# Allegro board moborts.brd
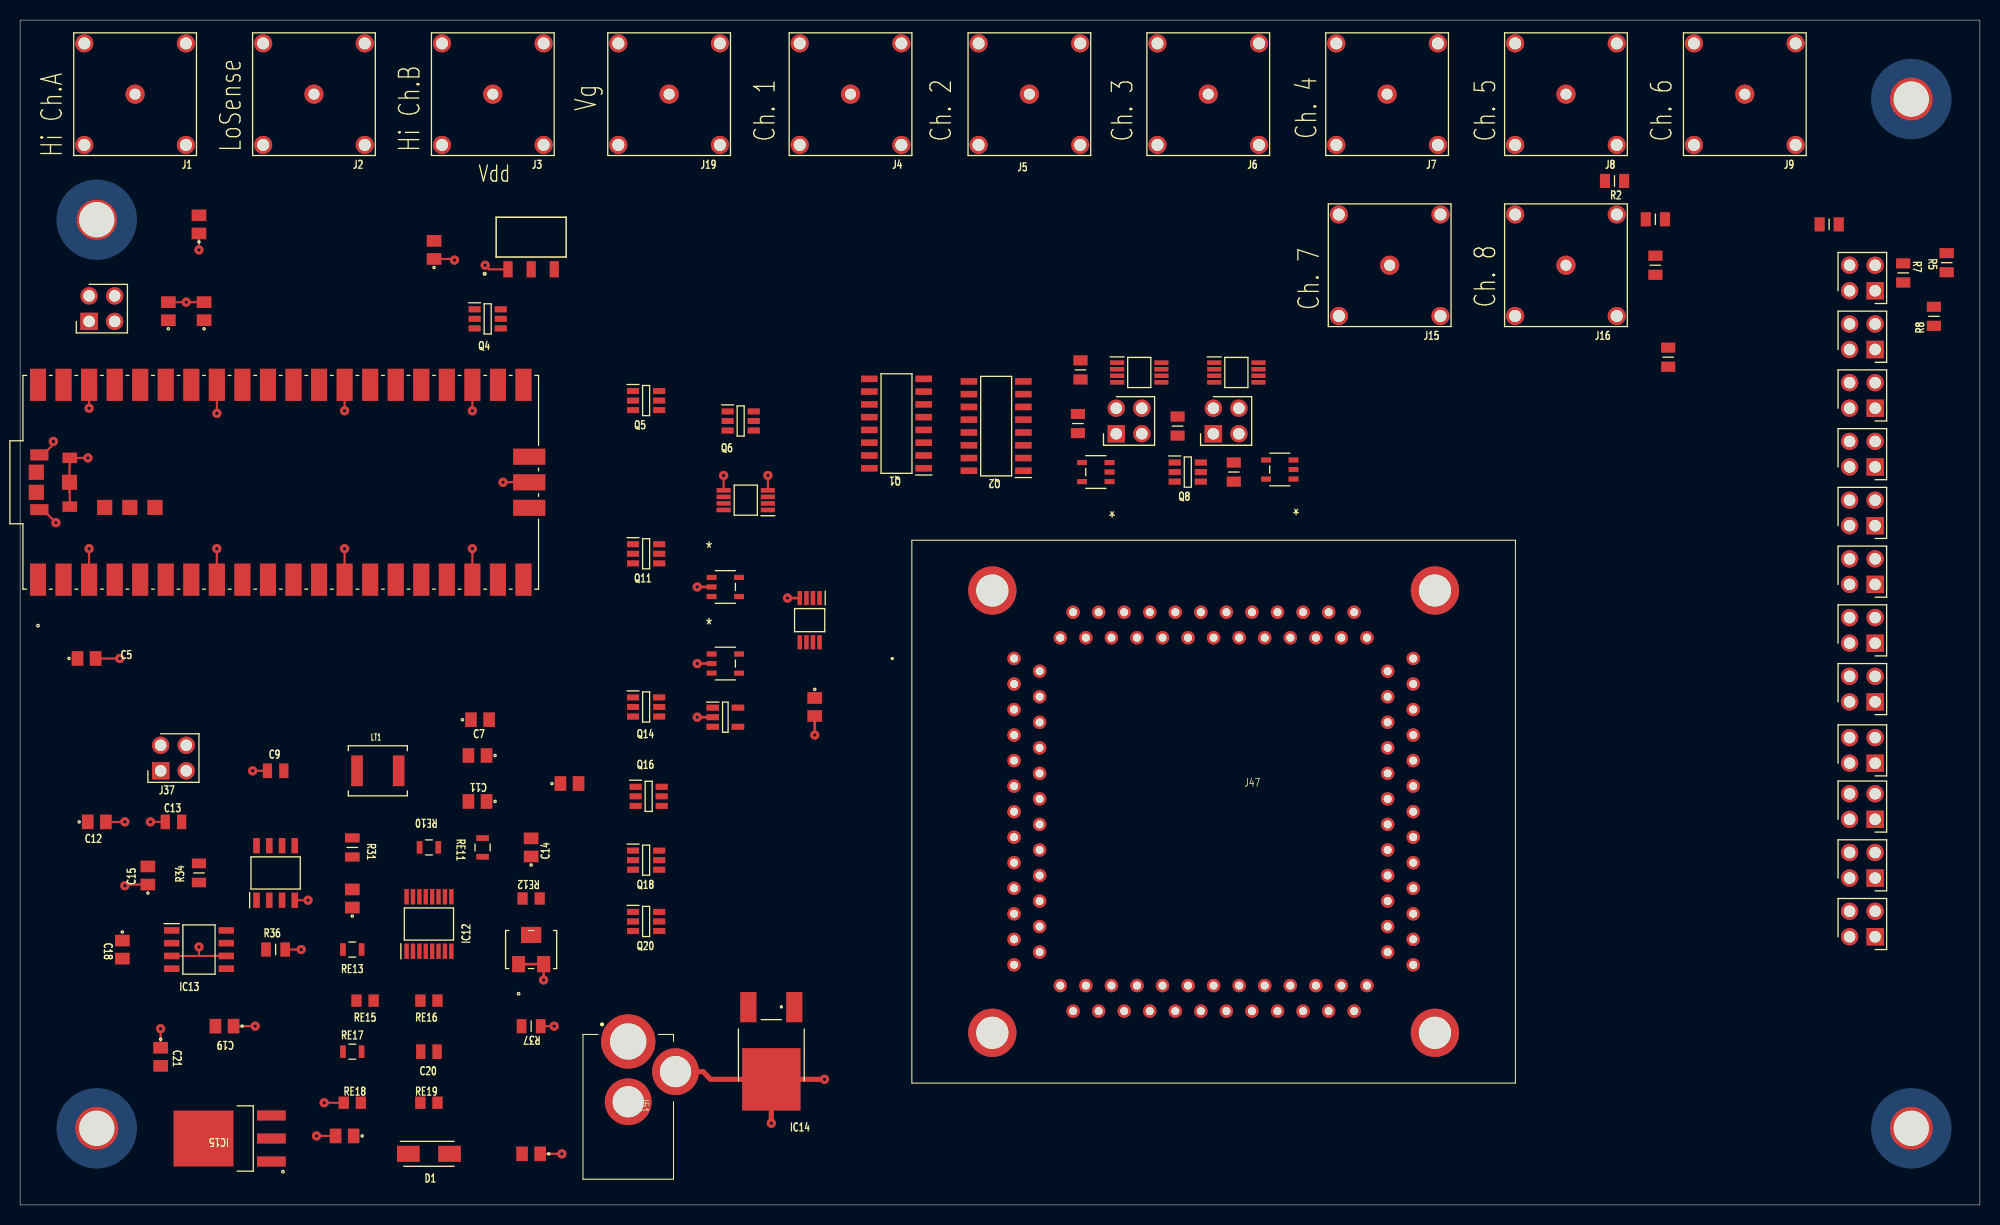
[diagram p0: board, top side]
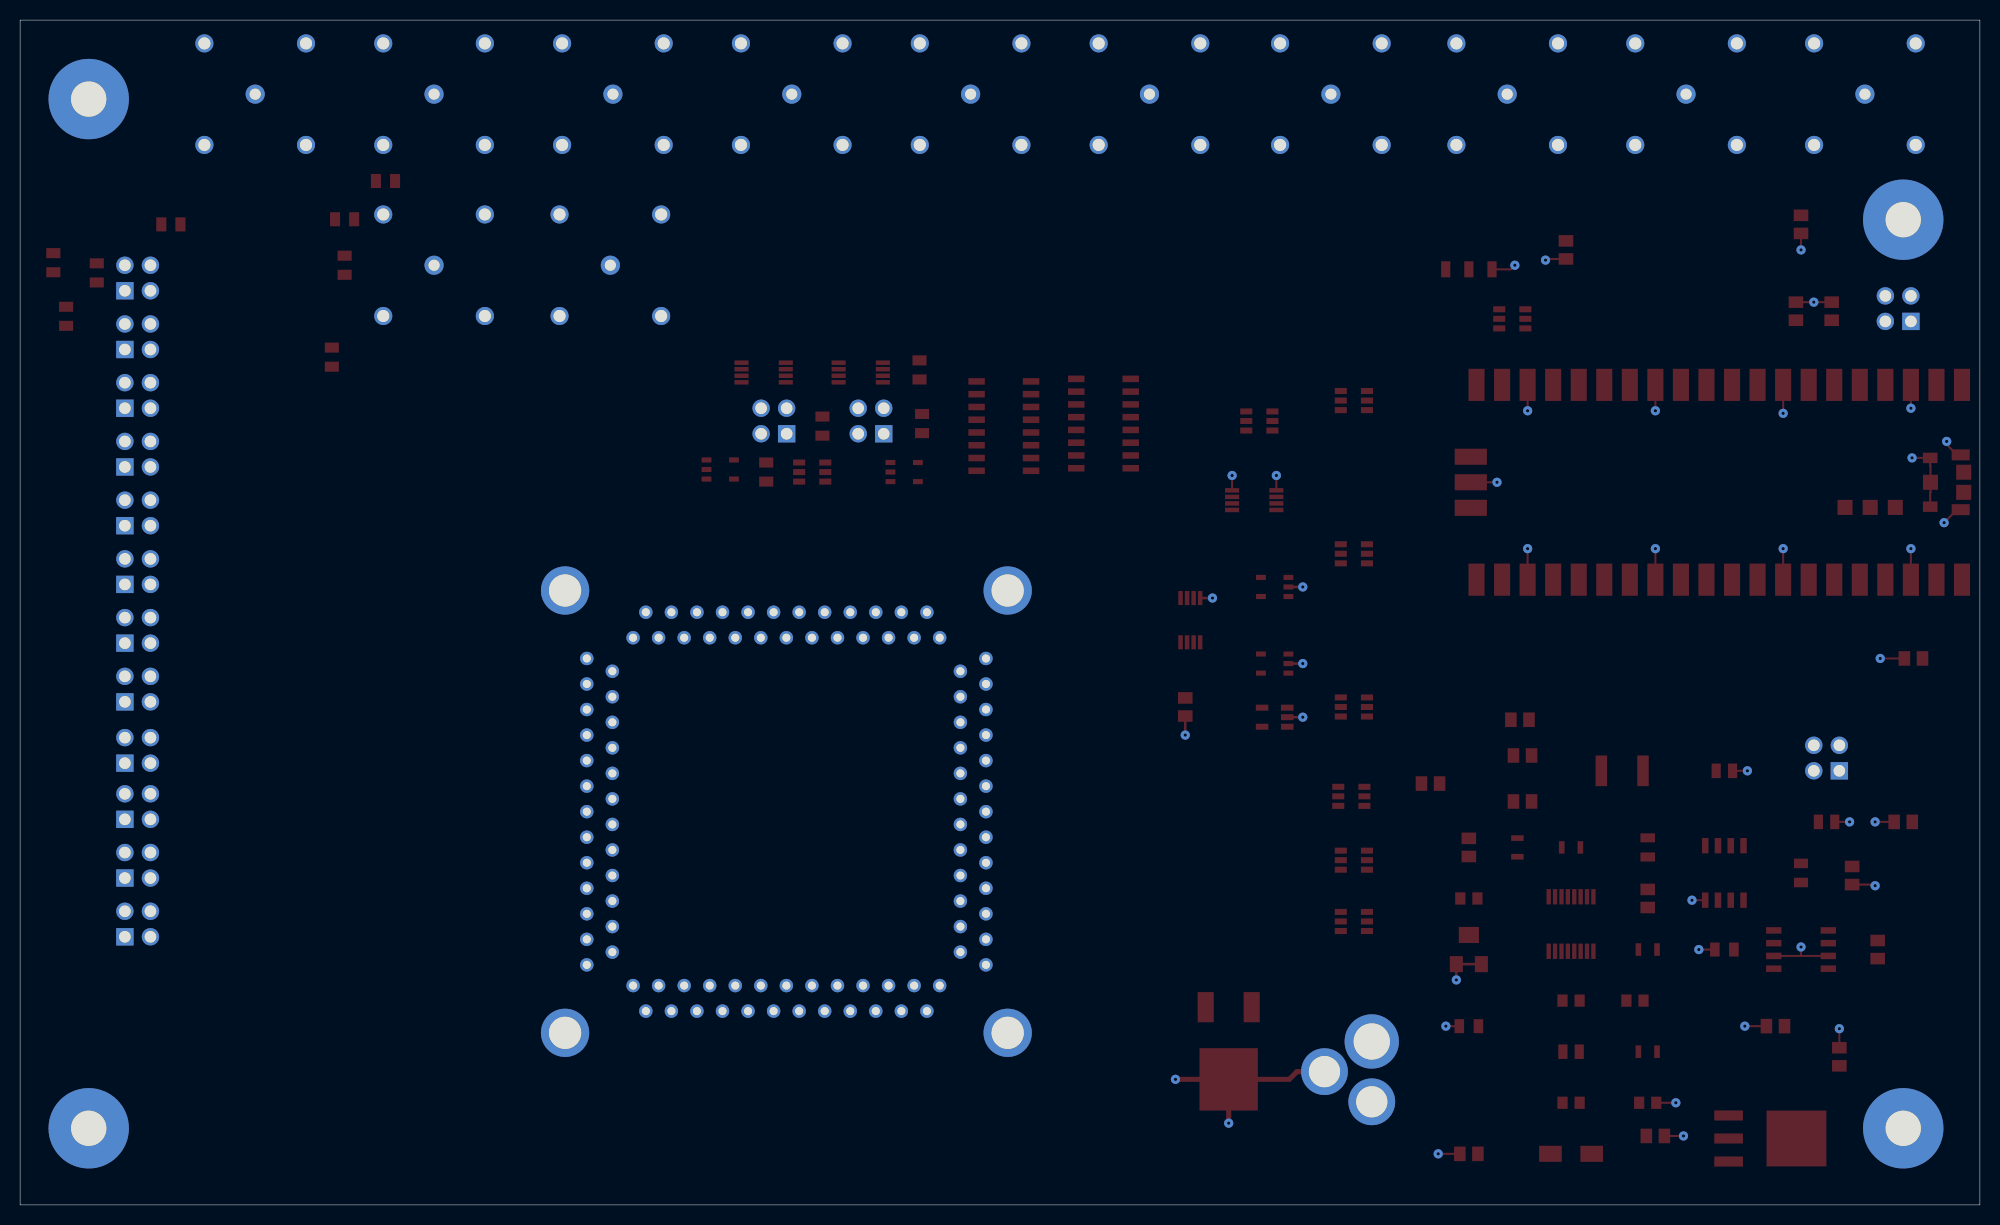
[diagram p1: board, bottom side, seen from below]

Outline 194.82 x 117.86 mm; copper layers: TOP, LAYER_1, GND, BOTTOM. Coordinates in mm from the lower left corner of the outline.
Outline path: 0,117.86 194.82,117.86 194.82,0 0,0 0,117.86

## Design rules (mm)
constraint set DEFAULT: min track width 0.203, pair gap 0.203

## Placement (name value [footprint] x y rotation side)
1  GND Mounting Hole  [M3MOUNTINGHOLE_ELEC]  188 110 0 top
2  GND2 Mounting Hole  [M3MOUNTINGHOLE_ELEC#2]  7.62 98 0 top
3  GND Mounting Hole  [M3MOUNTINGHOLE_ELEC]  7.62 7.62 0 top
4  GND Mounting Hole  [M3MOUNTINGHOLE_ELEC]  188 7.62 0 top
C1  0.1uF  [C0805]  17.78 97.54 90 top
C2  0.1uF  [C0805]  41.15 95 90 top
C3  1 uF  [C0805]  14.73 88.9 90 top
C4  1 uF  [C0805]  18.29 88.9 90 top
C5  1 uF  [C0805]  6.6 54.36 0 top
C6  1 uF  [C0805]  78.99 49.53 270 top
C7  0.015uF  [C0805]  45.72 48.26 0 top
C8  1 uF  [C0805]  45.47 44.7 180 top
C9  10pF  [CAPC2013X94N]  25.4 43.18 0 top
C10  4.7uF  [C0805]  54.61 41.91 0 top
C11  10uF  [C0805]  45.47 40.13 180 top
C12  1 uF  [C0805]  7.62 38.1 0 top
C13  10pF  [CAPC2013X94N]  15.24 38.1 0 top
C14  3.9uF  [C0805]  50.8 35.56 90 top
C15  0.1uF  [C0805]  12.7 32.77 90 top
C17  20pF  [C0805]  33.02 30.48 90 top
C18  10uF  [C0805]  10.16 25.4 270 top
C19  0.1uF  [C0805]  20.32 17.78 180 top
C20  10pF  [CAPC2013X94N]  40.64 15.24 0 top
C21  0.015uF  [C0805]  13.97 14.73 270 top
C22  10uF  [C0805]  32.26 6.86 180 top
C23  0.1uF  [C0805]  50.8 5.08 180 top
CR1  LD1117S33TR  [SOT-223_STM]  50.8 96.27 0 top
D1  FM4002-W  [DIOM5025X231N]  40.64 5.08 0 top
IC2  OPA202IDGKR  [SOP65P490X110-8N]  111.25 82.8 0 top
IC3  OPA202IDGKR  [SOP65P490X110-8N]  120.9 82.8 0 top
IC8  OPA202IDGKR  [SOP65P490X110-8N]  72.14 70.1 180 top
IC9  OPA202IDGKR  [SOP65P490X110-8N]  78.49 58.17 270 top
IC10  1p2Vregulatorr  [SOT95P275X110-5N]  70.1 48.51 0 top
IC11  UCC284DP-ADJ  [SOIC127P600X175-8N]  25.4 33.02 90 top
IC12  LTC6082IGN#PBF  [SOP64P601X175-16N]  40.64 27.94 90 top
IC13  MAX660CSA+  [SOIC127P600X175-8N]  17.78 25.4 0 top
IC14  5vReg  [NCV5501DT50RKG]  74.68 16 90 top
IC15  LM317MDTG  [TO229P990X238-4N]  20.83 6.6 180 top
J1  CSInput  [1-1337445-0]  11.43 110.49 0 top
J2  LoSense  [1-1337445-0]  29.21 110.49 0 top
J3  VddIN  [1-1337445-0]  46.99 110.49 0 top
J4  ch1  [1-1337445-0]  82.55 110.49 0 top
J5  ch2  [1-1337445-0]  100.33 110.49 0 top
J6  ch3  [1-1337445-0]  118.11 110.49 0 top
J7  ch4  [1-1337445-0]  135.89 110.49 0 top
J8  ch5  [1-1337445-0]  153.67 110.49 0 top
J9  ch6  [1-1337445-0]  171.45 110.49 0 top
J15  ch7  [1-1337445-0]  136.14 93.47 0 top
J16  ch8  [1-1337445-0]  153.67 93.47 0 top
J19  Vg  [1-1337445-0]  64.52 110.49 0 top
J21  amp0Gain  [HDRV4W67P254_2X2_508X483X858P]  184.4 90.93 90 top
J22  isourceSelect  [HDRV4W67P254_2X2_508X483X858P]  6.86 87.88 0 top
J23  amp1Gain  [HDRV4W67P254_2X2_508X483X858P]  184.4 85.09 90 top
J24  amp2Gain  [HDRV4W67P254_2X2_508X483X858P]  184.4 79.25 90 top
J25  p5macs0,1  [HDRV4W67P254_2X2_508X483X858P]  108.97 76.71 0 top
J26  p5macs2,3  [HDRV4W67P254_2X2_508X483X858P]  118.62 76.71 0 top
J29  amp3Gain  [HDRV4W67P254_2X2_508X483X858P]  184.4 73.41 90 top
J30  amp4Gain  [HDRV4W67P254_2X2_508X483X858P]  184.4 67.56 90 top
J31  amp5Gain  [HDRV4W67P254_2X2_508X483X858P]  184.4 61.72 90 top
J32  amp6Gain  [HDRV4W67P254_2X2_508X483X858P]  184.4 55.88 90 top
J34  amp7Gain  [HDRV4W67P254_2X2_508X483X858P]  184.4 50.04 90 top
J35  vout1Byp  [HDRV4W67P254_2X2_508X483X858P]  184.4 43.94 90 top
J37  biasteeBYP  [HDRV4W67P254_2X2_508X483X858P]  13.97 43.18 0 top
J39  vout3Byp  [HDRV4W67P254_2X2_508X483X858P]  184.4 38.35 90 top
J41  vout5Byp  [HDRV4W67P254_2X2_508X483X858P]  184.4 32.51 90 top
J42  vout7Byp  [HDRV4W67P254_2X2_508X483X858P]  184.4 26.67 90 top
J47  IC51-1004-405-1  [IC5110044051]  98.81 54.36 0 top
J51  12vPS  [PJ202AH]  60.45 16.26 270 top
L1  100 uH  [1812FS104JLC]  35.56 43.18 90 top
Q1  ALD210800ASCL  [SOIC127P600X175-16N]  87.12 77.72 180 top
Q2  ALD210800ASCL  [SOIC127P600X175-16N]  97.03 77.47 180 top
Q4  chan1  [SOT95P285X145-6N]  46.48 88.14 0 top
Q5  chan2  [SOT95P285X145-6N]  62.23 80.01 0 top
Q6  p5macs0,1  [SOT95P285X145-6N]  71.63 77.98 0 top
Q8  p5macs2,3  [SOT95P285X145-6N]  116.08 72.9 0 top
Q11  chan3  [SOT95P285X145-6N]  62.23 64.77 0 top
Q14  chan4  [SOT95P285X145-6N]  62.23 49.53 0 top
Q16  vgLSelect  [SOT95P285X145-6N]  62.48 40.64 0 top
Q18  vddSelect  [SOT95P285X145-6N]  62.23 34.29 0 top
Q20  vgPSelect  [SOT95P285X145-6N]  62.23 28.19 0 top
R2  300  [RESC2012X65N]  158.5 101.85 0 top
R3  300  [RESC2012X65N]  162.56 98.04 180 top
R4  300  [RESC2012X65N]  179.83 97.54 0 top
R5  300  [RESC2012X65N]  191.52 93.73 270 top
R6  300  [RESC2012X65N]  162.56 93.47 90 top
R7  300  [RESC2012X65N]  187.2 92.71 270 top
R8  300  [RESC2012X65N]  190.25 88.39 90 top
R9  300  [RESC2012X65N]  163.83 84.33 270 top
R10  1K  [RESC2012X65N]  105.41 83.06 90 top
R13  1K  [RESC2012X65N]  105.16 77.72 270 top
R17  1K  [RESC2012X65N]  115.06 77.47 90 top
R21  1K  [RESC2012X65N]  120.65 72.9 90 top
R31  10M  [RESC2012X55N]  33.02 35.56 270 top
R34  10K  [RESC2012X60N]  17.78 33.02 90 top
R36  10K  [RESC2012X60N]  25.4 25.4 180 top
R37  10K  [RESC2012X60N]  50.8 17.78 180 top
RE1  p5maCS3  [21-0057F_MXM]  125.22 73.15 180 top
RE3  p5maCS2  [21-0057F_MXM]  106.93 72.9 180 top
RE7  SC0915  [SC0915_RPI]  25.91 71.88 90 top
RE8  p5maCS1  [21-0057F_MXM]  70.1 61.47 0 top
RE9  p5maCS0  [21-0057F_MXM]  70.1 53.85 0 top
RE10  100K  [MCU0805_VIS]  40.64 35.56 180 top
RE11  100K  [MCU0805_VIS]  45.97 35.56 270 top
RE12  97.6K  [RC0805N_YAG]  50.8 30.48 180 top
RE13  100K  [MCU0805_VIS]  33.02 25.4 0 top
RE14  POT  [POT_PVGA5_BRN]  50.8 25.4 90 top
RE15  1K  [RC0805N_YAG]  34.29 20.32 0 top
RE16  100  [RC0805N_YAG]  40.64 20.32 0 top
RE17  100K  [MCU0805_VIS]  33.02 15.24 0 top
RE18  100  [RC0805N_YAG]  33.02 10.16 0 top
RE19  470  [RC0805N_YAG]  40.64 10.16 0 top

## Library data of the parts
1-4 = m3MountingHole
C1 C2 C15 C19 C23 = C0805R104J5RACTU
C3-C6 C8 C12 = 0805ZC105JAT2A
C7 C10 C17 C21 = C0805X200J5GACTU
C9 C13 C20 = 08053A100KAT2A
C11 C18 C22 = C0805C106M3PAC7210
C14 = C0805C395K9PACTU
CR1 = LD1117S33TR: User Part Number: PN; Tolerance: TOL
D1 = FM4002-W
IC2 IC3 IC8 IC9 = OPA202IDGKR
IC10 = NCV8164ASN120T1G
IC11 = UCC284DP-ADJ
IC12 = LTC6082IGN#PBF
IC13 = MAX660CSA+
IC14 = NCV5501DT50RKG
IC15 = LM317MDTG
J1-J9 J15 J16 J19 = 1-1337445-0
J21-J26 J29-J32 J34 J35 J37 J39 J41 J42 = M22-2020205
J47 = IC51-1004-405-1
J51 = PJ-202AH
L1 = 1812FS-104JLC
Q1 Q2 = ALD210800ASCL
Q4-Q6 Q8 Q11 Q14 Q16 Q18 Q20 = DMN2004DMK-7
R2-R10 R13 R17 R21 = SDR10EZPF2001
R31 = MCU08050C1005FP500
R34 R36 R37 = AT0805FRE0710KL
RE1 RE3 RE8 RE9 = DS4303RTR: User Part Number: PN; Tolerance: TOL
RE7 = SC0915: User Part Number: PN; Tolerance: TOL
RE10 RE11 RE13 RE17 = MCU08050C1003FP500: User Part Number: PN; Tolerance: TOL
RE12 = RT0805FRE0797K6L: User Part Number: PN; Tolerance: TOL
RE14 = PVG5A502C03R00
RE15 = RT0805FRE071KL: User Part Number: PN; Tolerance: TOL
RE16 RE18 = RT0805BRE07100RL: User Part Number: PN; Tolerance: TOL
RE19 = RT0805DRD07470RL: User Part Number: PN; Tolerance: TOL

## Footprints (pads in the part's own frame, mm; a bottom-side part is the same pattern mirrored in y, then rotated)
1-1337445-0
  round 1.905 hole 1.1: 1(0,0)
  round 1.8 hole 1.2: 2(-5.05,-5.05) 3(5.05,-5.05) 4(5.05,5.05) 5(-5.05,5.05)
21-0057F_MXM
  rect 0.978x0.508 smd: 1(-1.365,0.95) 2(-1.365,0) 3(-1.365,-0.95) 4(1.365,-0.95) 5(1.365,0.95)
1812FS104JLC
  rect 3.05x1.14 smd: 1(0,-2.07) 2(0,2.07)
C0805
  rect 1.15x1.45 smd: 1(-0.9,0) 2(0.9,0)
CAPC2013X94N
  rect 0.914x1.448 smd: 1(-0.813,0) 2(0.813,0)
DIOM5025X231N
  rect 2.25x1.6 smd: 1(-2.05,0) 2(2.05,0)
HDRV4W67P254_2X2_508X483X858P
  rect 1.725x1.725 hole 1.15: 1(0,0)
  round 1.725 hole 1.15: 2(0,2.54) 3(2.54,0) 4(2.54,2.54)
IC5110044051
  round 1.333 hole 0.8: 1(0,-15.24) 2(2.54,-16.51) 3(0,-17.78) 4(2.54,-19.05) 5(0,-20.32) 6(2.54,-21.59) 7(0,-22.86) 8(2.54,-24.13) 9(0,-25.4) 10(2.54,-26.67) 11(0,-27.94) 12(2.54,-29.21) 13(0,-30.48) 14(4.6,-32.54) 15(5.87,-35.08) 16(7.14,-32.54) 17(8.41,-35.08) 18(9.68,-32.54) 19(10.95,-35.08) 20(12.22,-32.54) 21(13.49,-35.08) 22(14.76,-32.54) 23(16.03,-35.08) 24(17.3,-32.54) 25(18.57,-35.08) 26(19.84,-32.54) 27(21.11,-35.08) 28(22.38,-32.54) 29(23.65,-35.08) 30(24.92,-32.54) 31(26.19,-35.08) 32(27.46,-32.54) 33(28.73,-35.08) 34(30,-32.54) 35(31.27,-35.08) 36(32.54,-32.54) 37(33.81,-35.08) 38(35.08,-32.54) 39(39.68,-30.48) 40(37.14,-29.21) 41(39.68,-27.94) 42(37.14,-26.67) 43(39.68,-25.4) 44(37.14,-24.13) 45(39.68,-22.86) 46(37.14,-21.59) 47(39.68,-20.32) 48(37.14,-19.05) 49(39.68,-17.78) 50(37.14,-16.51) 51(39.68,-15.24) 52(37.14,-13.97) 53(39.68,-12.7) 54(37.14,-11.43) 55(39.68,-10.16) 56(37.14,-8.89) 57(39.68,-7.62) 58(37.14,-6.35) 59(39.68,-5.08) 60(37.14,-3.81) 61(39.68,-2.54) 62(37.14,-1.27) 63(39.68,0) 64(35.08,2.06) 65(33.81,4.6) 66(32.54,2.06) 67(31.27,4.6) 68(30,2.06) 69(28.73,4.6) 70(27.46,2.06) 71(26.19,4.6) 72(24.92,2.06) 73(23.65,4.6) 74(22.38,2.06) 75(21.11,4.6) 76(19.84,2.06) 77(18.57,4.6) 78(17.3,2.06) 79(16.03,4.6) 80(14.76,2.06) 81(13.49,4.6) 82(12.22,2.06) 83(10.95,4.6) 84(9.68,2.06) 85(8.41,4.6) 86(7.14,2.06) 87(5.87,4.6) 88(4.6,2.06) 89(0,0) 90(2.54,-1.27) 91(0,-2.54) 92(2.54,-3.81) 93(0,-5.08) 94(2.54,-6.35) 95(0,-7.62) 96(2.54,-8.89) 97(0,-10.16) 98(2.54,-11.43) 99(0,-12.7) 100(2.54,-13.97)
  round 4.8 hole 3.2: MH1(-2.16,6.76) MH2(41.84,6.76) MH3(41.84,-37.24) MH4(-2.16,-37.24)
M3MOUNTINGHOLE_ELEC
  round 4.254 hole 3.5: 1(0,0)
M3MOUNTINGHOLE_ELEC#2
  round 4 hole 3.5: 1(0,0)
MCU0805_VIS
  rect 0.559x1.245 smd: 1(-0.927,0) 2(0.927,0)
NCV5501DT50RKG
  rect 3x1.6 smd: 1(3.667,-2.285) 2(3.667,2.285)
  rect 6.2x5.8 smd: 3(-3.512,0)
PJ202AH
  round 5.4 hole 3.6: 1(0,0)
  round 4.65 hole 3.1: 2(6,0) 3(3,4.7)
POT_PVGA5_BRN
  rect 1.6x1.295 smd: 1(-1.45,1.245) 2(-1.45,-1.245)
  rect 1.6x2.007 smd: 3(1.45,0)
RC0805N_YAG
  rect 1.016x1.219 smd: 1(-0.851,0) 2(0.851,0)
RESC2012X55N
  rect 0.9x1.45 smd: 1(-0.95,0) 2(0.95,0)
RESC2012X60N
  rect 0.95x1.4 smd: 1(-0.95,0) 2(0.95,0)
RESC2012X65N
  rect 1x1.4 smd: 1(-0.95,0) 2(0.95,0)
SC0915_RPI
  rect 3.2x1.6 smd: 1(-9.69,24.13) 2(-9.69,21.59) 3(-9.69,19.05) 4(-9.69,16.51) 5(-9.69,13.97) 6(-9.69,11.43) 7(-9.69,8.89) 8(-9.69,6.35) 9(-9.69,3.81) 10(-9.69,1.27) 11(-9.69,-1.27) 12(-9.69,-3.81) 13(-9.69,-6.35) 14(-9.69,-8.89) 15(-9.69,-11.43) 16(-9.69,-13.97) 17(-9.69,-16.51) 18(-9.69,-19.05) 19(-9.69,-21.59) 20(-9.69,-24.13) 21(9.69,-24.13) 22(9.69,-21.59) 23(9.69,-19.05) 24(9.69,-16.51) 25(9.69,-13.97) 26(9.69,-11.43) 27(9.69,-8.89) 28(9.69,-6.35) 29(9.69,-3.81) 30(9.69,-1.27) 31(9.69,1.27) 32(9.69,3.81) 33(9.69,6.35) 34(9.69,8.89) 35(9.69,11.43) 36(9.69,13.97) 37(9.69,16.51) 38(9.69,19.05) 39(9.69,21.59) 40(9.69,24.13)
  rect 1.092x1.803 smd: A(-2.725,24) B(2.725,24)
  rect 1.041x1.448 smd: C(-2.426,20.97) D(2.426,20.97)
  rect 1.6x3.2 smd: D1(-2.54,-24.699) D2(0,-24.699) D3(2.54,-24.699)
  rect 1.499x1.499 smd: TP1(0,21.001) TP2(1.001,24.3) TP3(-1.001,24.3) TP4(-2.499,17.501) TP5(-2.499,15.001) TP6(-2.499,12.502)
SOIC127P600X175-8N
  rect 1.525x0.65 smd: 1(-2.712,1.905) 2(-2.712,0.635) 3(-2.712,-0.635) 4(-2.712,-1.905) 5(2.712,-1.905) 6(2.712,-0.635) 7(2.712,0.635) 8(2.712,1.905)
SOIC127P600X175-16N
  rect 1.638x0.65 smd: 1(-2.706,4.445) 2(-2.706,3.175) 3(-2.706,1.905) 4(-2.706,0.635) 5(-2.706,-0.635) 6(-2.706,-1.905) 7(-2.706,-3.175) 8(-2.706,-4.445) 9(2.706,-4.445) 10(2.706,-3.175) 11(2.706,-1.905) 12(2.706,-0.635) 13(2.706,0.635) 14(2.706,1.905) 15(2.706,3.175) 16(2.706,4.445)
SOP64P601X175-16N
  rect 1.526x0.435 smd: 1(-2.712,2.222) 2(-2.712,1.588) 3(-2.712,0.952) 4(-2.712,0.318) 5(-2.712,-0.318) 6(-2.712,-0.952) 7(-2.712,-1.588) 8(-2.712,-2.222) 9(2.712,-2.222) 10(2.712,-1.588) 11(2.712,-0.952) 12(2.712,-0.318) 13(2.712,0.318) 14(2.712,0.952) 15(2.712,1.588) 16(2.712,2.222)
SOP65P490X110-8N
  rect 1.4x0.45 smd: 1(-2.2,0.975) 2(-2.2,0.325) 3(-2.2,-0.325) 4(-2.2,-0.975) 5(2.2,-0.975) 6(2.2,-0.325) 7(2.2,0.325) 8(2.2,0.975)
SOT95P275X110-5N
  rect 1.25x0.6 smd: 1(-1.25,0.95) 2(-1.25,0) 3(-1.25,-0.95) 4(1.25,-0.95) 5(1.25,0.95)
SOT95P285X145-6N
  rect 1.2x0.6 smd: 1(-1.3,0.95) 2(-1.3,0) 3(-1.3,-0.95) 4(1.3,-0.95) 5(1.3,0) 6(1.3,0.95)
SOT-223_STM
  rect 0.914x1.6 smd: 1(-2.3,-3.2) 2(0,-3.2) 3(2.3,-3.2)
TO229P990X238-4N
  rect 2.85x1 smd: 1(-4.15,2.29) 2(-4.15,0) 3(-4.15,-2.29)
  rect 5.95x5.55 smd: 4(2.6,0)

## Nets
3V3_EN: RE7.37
+2.5V: C21.2 C23.2 D1.1(K) IC12.4 IC15.4(VOUT_(TAB)) RE19.1
+3V_RELAY: Q4.3 Q4.6 Q5.3 Q5.6 Q11.3 Q11.6 Q14.3 Q14.6
+5V: C5.1 C12.1 IC10.1 IC10.3 IC13.8(V+) IC14.2(VOUT) Q1.12 Q2.12 RE7.39(VSYS)
-2.5V: C10.2 C15.2 C17.2 IC11.5 IC12.13(V-) R34.2
-5V: C8.2 C11.2 IC11.2 IC11.3 IC11.6 IC11.7 IC13.5
GND: 1.1(GND) 3.1(GND) 4.1(GND) C1.1 C2.1 C3.2 C4.2 C5.2 C6.2 C7.2 C8.1 C9.1 C10.1 C11.1 C12.2 C13.1 C15.1 C19.1 C21.1 C22.2 C23.1 CR1.1 IC2.4(V-) IC3.4(V-) IC8.4(V-) IC9.4(V-) IC10.2 IC11.4 IC12.5 IC12.6 IC13.3 IC13.6 IC14.3 J1.2 J1.3 J1.4 J1.5 J2.1 J2.2 J2.3 J2.4 J2.5 J3.2 J3.3 J3.4 J3.5 J4.2 J4.3 J4.4 J4.5 J5.2 J5.3 J5.4 J5.5 J6.2 J6.3 J6.4 J6.5 J7.2 J7.3 J7.4 J7.5 J8.2 J8.3 J8.4 J8.5 J9.2 J9.3 J9.4 J9.5 J15.2 J15.3 J15.4 J15.5 J16.2 J16.3 J16.4 J16.5 J19.2 J19.3 J19.4 J19.5 J21.2 J23.2 J24.2 J29.2 J30.2 J31.2 J32.2 J34.2 J47.1 J47.13 J47.16 J47.25 J47.26 J47.37 J47.39 J47.46 J47.49 J47.52 J47.81 J47.89 J51.2(TIP) J51.3 Q1.4 Q1.5(V-) Q1.8 Q1.9 Q1.13 Q2.4 Q2.5(V-) Q2.8 Q2.9 Q2.13 R10.1 R13.1 R17.2 R21.2 R36.1 R37.1 RE1.2 RE3.2 RE7.3 RE7.8 RE7.13 RE7.18 RE7.23 RE7.28 RE7.33 RE7.38 RE7.A RE7.B RE7.C RE7.D RE7.D2 RE7.TP1 RE8.2 RE9.2 RE14.1 RE14.2 RE18.1
GND2: 2.1(GND)
VBUS: RE7.40
VDD: C2.2 J3.1 Q18.3 Q18.6
VDD_HV: Q18.5 RE7.9
VDD_LV: Q18.2 RE7.12
VDDHV: Q18.4
VDDHV0: J47.3
VDDHV1: J47.47
VDDLV: Q18.1(S2)
VDDLV0: J47.99
VDDLV1: J47.14
VDDLV2: J47.74
ADC_VREF: RE7.35
AMPBIAS0: J47.86
AMPBIAS0_H: Q1.15
AMPBIAS1: J47.83
AMPBIAS1_H: Q1.6
AMPBIAS2: J47.78
AMPBIAS2_H: Q2.6
AMPBIAS3: J47.75
AMPBIAS3_H: Q2.11
AMPBIAS4: J47.69
AMPBIAS5: J47.66
AMPBIAS6: J47.63
AMPBIAS6_H: Q2.2
AMPBIAS7: J47.55
AMPBIAS7_H: Q2.15
CH.6: J9.1
CH.8: J16.1
CHAN1: J4.1
CHAN1_VO1: Q5.2 RE7.15
CHAN1_VO2: Q11.2 RE7.16
CHAN1_VO3: Q14.2 RE7.17
CHAN1_VO4: Q4.5 RE7.19
CHAN1_VO5: Q5.5 RE7.20
CHAN1_VO6: Q11.5 RE7.21
CHAN1_VO7: Q14.5 RE7.22
CHAN1_VOOFF: Q4.2 RE7.14
CSIN: J47.97 RE7.24
DHIN: J47.95 RE7.6
DIN: J47.6 RE7.5
G_HVN: Q16.5 RE7.11
G_HVP: Q20.2 RE7.1
G_LVN: Q16.2 RE7.10
G_LVP: Q20.5 RE7.2
HCLKIN: J47.53 RE7.4
IBIAS0: J47.17 R3.1
IBIAS1: J47.19 R7.2
IBIAS2: J47.21 R8.1
IBIAS3: J47.23 R5.2
IBIAS4: J47.29 R2.1
IBIAS5: J47.31 R9.2
IBIAS6: J47.33 R6.1
IBIAS7: J47.35 R4.2
IN_N0: J21.1 J21.3 J47.87
IN_N1: J23.1 J23.3 J47.84
IN_N2: J24.1 J24.3 J47.79
IN_N3: J29.1 J29.3 J47.76
IN_N4: J30.1 J30.3 J47.70
IN_N5: J31.1 J31.3 J47.67
IN_N6: J32.1 J32.3 J47.64
IN_N7: J34.1 J34.3 J47.56
NANOAMPVDD: J22.1 RE17.1
P5MACS0: J25.4 Q1.2 Q1.3 Q1.7 Q1.14
P5MACS0_ADJ: RE9.1
P5MACS0_VIN: RE9.3
P5MACS1: J25.1 Q1.10 Q1.11 Q2.7 Q2.10
P5MACS1_ADJ: RE8.1
P5MACS1_VIN: RE8.3
P5MACS2: J26.4
P5MACS2_ADJ: RE3.1
P5MACS2_VIN: RE3.3
P5MACS3: J26.1 Q2.3 Q2.14
P5MACS3_ADJ: RE1.1
P5MACS3_VIN: RE1.3
P5MACS_FB0: IC9.2 Q6.1(S2) R13.2
P5MACS_FB1: IC8.2 Q6.4 R17.1
P5MACS_FB2: IC2.2 Q8.1(S2) R10.2
P5MACS_FB3: IC3.2 Q8.4 R21.1
P5MACS_G0: IC9.6 Q6.2
P5MACS_G1: IC8.6 Q6.5
P5MACS_G2: IC2.6 Q8.2
P5MACS_G3: IC3.6 Q8.5
POWERSUP: CR1.3 IC2.7 IC3.7 IC8.7 IC9.7 IC14.1 J51.1
PRECCR_OUTPUT: C3.1 C13.2(C2) J22.3 J37.2 L1.2
PRECCR_PWR: C19.2 IC15.3
QHOUT: J47.57
QNOUT: J47.96
QPOUT: J47.72
RESETBIN: J47.5 RE7.7
VCLKOUT: J47.73
VG: C1.2 J19.1 Q16.3 Q16.6 Q20.1(S2) Q20.4
VGHVN: Q16.4
VGHVP: J47.48 Q20.3
VGLVN: J47.100 Q16.1(S2)
VGLVP: J47.28 Q20.6
VGVHN: J47.4
VOUT0: J21.4 J35.1 J47.18
VOUT0BYP: J35.2
VOUT1: J23.4 J35.3 J47.20
VOUT1_OFF: Q4.1(S2)
VOUT1BYP: J35.4
VOUT2: J24.4 J39.1 J47.22
VOUT2_CH1: Q5.1(S2) Q5.4 Q11.4 Q14.4
VOUT2BYP: J39.2
VOUT3: J29.4 J39.3 J47.24
VOUT3_CH1: Q11.1(S2)
VOUT3BYP: J39.4
VOUT4: J30.4 J41.1 J47.30
VOUT4_CH1: Q4.4 Q14.1(S2)
VOUT4BYP: J41.2
VOUT5: J31.4 J41.3 J47.32
VOUT5BYP: J41.4
VOUT6: J32.4 J42.1 J47.34
VOUT6BYP: J42.2
VOUT7: J34.4 J42.3 J47.36
VOUT7BYP: J42.4
VOUTBYP0: J47.88
VOUTBYP1: J47.85
VOUTBYP2: J47.80
VOUTBYP3: J47.77
VOUTBYP4: J47.71
VOUTBYP5: J47.68
VOUTBYP6: J47.65
VOUTBYP7: J47.54
VPRHV2: J47.2
VPWRHV: C4.1 CR1.2(VOUT) RE1.5 RE3.5 RE8.5 RE9.5
VPWRHV0: J47.82
VPWRHV1: J47.27
VPWRHV3: J47.51
VPWRLV: C6.1 IC10.5
VPWRLV0: J47.98
VPWRLV1: J47.50
VPWRLV2: J47.15
VPWRLV3: J47.38
N00002: IC12.3 RE17.2 RE18.2
N00003: IC12.2 RE15.2 RE16.1
N00008: C20.1 IC12.1 R31.2 RE13.1
N00015: IC12.12 RE12.2 RE13.2
N00017: C14.2 IC12.11 RE10.1 RE11.1
N00022: C14.1 IC12.10 RE11.2 RE15.1
N00110: C22.1 D1.2 IC15.1 R37.2 RE19.2
N00119: C18.1 IC13.2
N00145: IC12.14 J37.1 J37.3 R31.1
N00155: IC12.15 IC12.16 RE10.2
N00157: C7.1 IC11.8
N00158: C17.1 IC11.1(VOUTS) R34.1 R36.2
N03990: C18.2 IC13.4
N24468: C9.2(C2) J37.4 L1.1
N27990: RE7.36
N55742: J8.1
N65632: RE7.26
N65748: RE7.32
N65777: RE7.31
N65800: RE7.29
N65828: RE7.27
N215843: RE12.1 RE14.3
N220461: C20.2(C2) RE16.2
N349619: IC9.3 RE9.4(VOUT)
N349769: IC8.3 RE8.4(VOUT)
N349907: IC2.3 RE3.4(VOUT)
N350037: IC3.3 RE1.4(VOUT)
N352442: J25.2 Q6.6
N352518: J25.3 Q6.3
N352722: J26.2 Q8.6
N352774: J26.3 Q8.3
N363503: J1.1 J22.2 J22.4
N374620: J7.1
N374627: J6.1
N375818: J15.1
N375917: J5.1
N3633990: R3.2
N3633991: R7.1
N3633992: R8.2
N3633993: R5.1
N3633994: R2.2
N3633995: R9.1
N3633996: R6.2
N3633997: R4.1

Pads without a net: IC2 1 5 8; IC3 1 5 8; IC8 1 5 8; IC9 1 5 8; IC10 4; IC12 7 8 9; IC13 1 7; IC15 2; J47 7 8 9 10 11 12 40 41 42 43 44 45 58 59 60 61 62 90 91 92 93 94 MH1 MH2 MH3 MH4; Q1 1 16; Q2 1 16; RE7 25 30 34 D1 D3 TP2 TP3 TP4 TP5 TP6

## Via types
v1: diameter 0.914, hole 0.33, TOP to BOTTOM, 40 vias

## Routing (per net, layer and track width the routed paths; a pad name or vN(x,y) marks a point on that pad's centre or on a via; arc(x,y) is an arc through that point)
GND: length 446.3
  TOP w0.203: v1(6.74,74.31) RE7.D 4.94,73.53 4.91,73.5 RE7.TP1 4.91,70.88 4.94,70.85 RE7.C ; RE7.33 v1(19.56,78.74) ; 17.78,24.77 v1(17.78,25.65) ; 17.78,24.77 IC13.6 ; 17.78,24.77 IC13.3 ; C15.1 10.53,31.87 v1(10.41,31.75) ; C3.2 v1(16.51,89.8) C4.2 ; v1(3.56,67.86) 2.26,69.16 RE7.A ; C21.1 v1(13.97,17.53) ; C23.1 v1(53.85,5.08) ; C13.1 v1(12.95,38.1) ; C1.1 v1(17.78,95) ; RE7.38 v1(6.86,79.25) ; RE7.D2 v1(48.01,71.88) ; IC8.4 v1(74.34,72.56) ; RE7.28 v1(32.26,78.99) ; C22.2 v1(29.46,6.86) ; v1(46.23,93.47) 46.63,93.07 CR1.1 ; C2.1 43.06,94.1 v1(43.18,93.98) ; RE7.13 v1(32.26,65.28) ; R36.1 v1(27.94,25.4) ; C19.1 v1(23.37,17.78) ; C9.1 v1(23.11,43.18) ; IC11.4 v1(28.62,30.31) ; C5.2 v1(9.91,54.36) ; RE7.B 2.26,74.61 3.3,75.65 v1(3.3,75.95) ; RE7.8 v1(19.56,65.28) ; RE18.1 v1(30.23,10.16) ; RE7.3 v1(6.86,65.28) ; RE7.18 v1(44.96,65.28) ; C12.2 v1(10.41,38.1) ; RE7.23 v1(44.96,78.99) ; R37.1 v1(53.09,17.78)
  TOP w0.254: RE14.1 RE14.2 v1(52.04,22.38) ; C6.2 v1(78.99,46.74) ; RE8.2 v1(67.31,61.47) ; RE9.2 v1(67.31,53.85) ; IC10.2 v1(67.31,48.51) ; IC9.4 v1(76.29,60.37)
  TOP w0.508: IC14.3 v1(79.97,12.49) ; IC14.3 68.65,12.49 67.88,13.26 J51.3 ; IC14.3 v1(74.68,8.13)
  GND w0.457: J47.52 136.98,40.39 ; J47.52 134.91,40.39 ; J47.52 135.95,41.42 ; J47.52 135.95,39.35 ; J16.3 159.98,88.42 ; J16.3 157.46,88.42 ; J16.3 158.72,87.17 ; J16.3 158.72,89.68 ; J6.3 123.16,106.7 ; J6.3 124.42,105.44 ; J6.3 121.9,105.44 ; J6.3 123.16,104.18 ; 134.91,32.77 J47.46 ; J47.46 136.98,32.77 ; J47.46 135.95,33.8 ; J47.46 135.95,31.73 ; J16.2 148.62,89.68 ; J16.2 149.88,88.42 ; J16.2 147.36,88.42 ; J16.2 148.62,87.17 ; J5.5 96.54,115.54 ; J5.5 95.28,114.28 ; J5.5 94.02,115.54 ; 117.38,18.24 J47.25 ; J47.25 116.34,19.28 ; J47.25 117.38,20.31 ; J47.25 118.41,19.28 ; J4.4 88.86,115.54 ; J4.4 87.6,114.28 ; J4.4 86.34,115.54 ; J23.2 183.08,85.09 ; J23.2 181.86,86.31 ; J23.2 180.65,85.09 ; J23.2 181.86,83.87 ; 24.16,104.18 J2.2 ; J2.2 22.9,105.44 ; J2.2 24.16,106.7 ; J2.2 25.42,105.44 ; J8.2 148.62,106.7 ; J8.2 148.62,104.18 ; J8.2 149.88,105.44 ; J8.2 147.36,105.44 ; 15.22,115.54 J1.4 ; J1.4 16.48,114.28 ; J1.4 17.74,115.54 ; J1.4 16.48,116.8 ; J47.89 99.84,54.36 ; J47.89 98.81,55.39 ; J47.89 97.77,54.36 ; J47.89 98.81,53.32 ; 138.49,22.84 J47.39 ; J47.39 138.49,24.91 ; J47.39 137.45,23.88 ; J47.39 139.52,23.88 ; J19.5 60.72,115.54 ; J19.5 58.21,115.54 ; J19.5 59.47,114.28 ; J5.2 96.54,105.44 ; J5.2 95.28,106.7 ; J5.2 95.28,104.18 ; J5.2 94.02,105.44 ; J4.5 78.76,115.54 ; J4.5 77.5,114.28 ; J4.5 76.24,115.54 ; J47.1 98.81,40.15 ; J47.1 97.77,39.12 ; J47.1 98.81,38.08 ; J47.1 99.84,39.12 ; J1.5 7.64,115.54 ; J1.5 6.38,116.8 ; J1.5 6.38,114.28 ; J1.5 5.12,115.54 ; 158.72,114.28 J8.4 ; J8.4 159.98,115.54 ; J8.4 157.46,115.54 ; J47.16 106.98,21.82 ; J47.16 105.95,22.85 ; J47.16 104.91,21.82 ; J47.16 105.95,20.78 ; 129.58,115.54 J7.5 ; J7.5 132.1,115.54 ; J7.5 130.84,114.28 ; 59.47,104.18 J19.2 ; J19.2 59.47,106.7 ; J19.2 60.72,105.44 ; J19.2 58.21,105.44 ; 105.38,104.18 J5.3 ; J5.3 104.12,105.44 ; J5.3 106.64,105.44 ; J5.3 105.38,106.7 ; 180.65,90.93 J21.2 ; J21.2 183.08,90.93 ; J21.2 181.86,89.71 ; J21.2 181.86,92.15 ; 181.86,66.35 J30.2 ; J30.2 181.86,68.78 ; J30.2 183.08,67.56 ; J30.2 180.65,67.56 ; J47.37 133.65,19.28 ; J47.37 132.62,20.31 ; J47.37 132.62,18.24 ; J47.37 131.58,19.28 ; J32.2 183.08,55.88 ; J32.2 181.86,54.66 ; J32.2 180.65,55.88 ; J32.2 181.86,57.1 ; 50.78,105.44 J3.3 ; J3.3 52.04,104.18 ; J3.3 53.3,105.44 ; J3.3 52.04,106.7 ; J2.1 29.21,111.81 ; J2.1 29.21,109.17 ; J2.1 27.89,110.49 ; J2.1 30.53,110.49 ; 34.26,114.28 J2.4 ; J2.4 35.52,115.54 ; J2.4 33,115.54 ; J2.4 34.26,116.8 ; 176.5,104.18 J9.3 ; J9.3 177.76,105.44 ; J9.3 175.24,105.44 ; J9.3 176.5,106.7 ; 22.9,115.54 J2.5 ; J2.5 25.42,115.54 ; J2.5 24.16,114.28 ; J2.5 24.16,116.8 ; 6.38,104.18 J1.2 ; J1.2 6.38,106.7 ; J1.2 7.64,105.44 ; J1.2 5.12,105.44 ; J1.3 16.48,106.7 ; J1.3 15.22,105.44 ; J1.3 16.48,104.18 ; J1.3 17.74,105.44 ; J15.2 132.35,88.42 ; J15.2 131.09,87.17 ; J15.2 129.84,88.42 ; J15.2 131.09,89.68 ; 139.94,98.52 J15.4 ; J15.4 142.45,98.52 ; J15.4 141.19,97.27 ; J15.4 141.19,99.78 ; J24.2 183.08,79.25 ; J24.2 181.86,80.47 ; J24.2 180.65,79.25 ; J24.2 181.86,78.03 ; 181.86,60.5 J31.2 ; J31.2 181.86,62.94 ; J31.2 183.08,61.72 ; J31.2 180.65,61.72 ; 180.65,50.04 J34.2 ; J34.2 183.08,50.04 ; J34.2 181.86,48.82 ; J34.2 181.86,51.26 ; 57.77,10.26 J51.2 ; J51.2 60.45,7.57 ; J51.2 63.13,10.26 ; J51.2 60.45,12.94 ; 69.57,114.28 J19.4 ; J19.4 68.31,115.54 ; J19.4 70.82,115.54 ; 148.62,114.28 J8.5 ; J8.5 147.36,115.54 ; J8.5 149.88,115.54 ; 140.94,114.28 J7.4 ; J7.4 142.2,115.54 ; J7.4 139.68,115.54 ; J2.3 34.26,106.7 ; J2.3 34.26,104.18 ; J2.3 35.52,105.44 ; J2.3 33,105.44 ; 147.36,98.52 J16.5 ; J16.5 149.88,98.52 ; J16.5 148.62,99.78 ; J16.5 148.62,97.27 ; 68.31,105.44 J19.3 ; J19.3 70.82,105.44 ; J19.3 69.57,104.18 ; J19.3 69.57,106.7 ; 40.68,105.44 J3.2 ; J3.2 41.94,106.7 ; J3.2 41.94,104.18 ; J3.2 43.2,105.44 ; J4.2 78.76,105.44 ; J4.2 77.5,106.7 ; J4.2 76.24,105.44 ; J4.2 77.5,104.18 ; 138.49,35.54 J47.49 ; J47.49 137.45,36.58 ; J47.49 139.52,36.58 ; J47.49 138.49,37.61 ; 165.14,115.54 J9.5 ; J9.5 167.66,115.54 ; J9.5 166.4,114.28 ; 123.16,114.28 J6.4 ; J6.4 124.42,115.54 ; J6.4 121.9,115.54 ; 175.24,115.54 J9.4 ; J9.4 177.76,115.54 ; J9.4 176.5,114.28 ; J29.2 183.08,73.41 ; J29.2 181.86,74.62 ; J29.2 180.65,73.41 ; J29.2 181.86,72.19 ; 118.65,20.78 J47.26 ; J47.26 117.61,21.82 ; J47.26 118.65,22.85 ; J47.26 119.68,21.82 ; J15.5 132.35,98.52 ; J15.5 129.84,98.52 ; J15.5 131.09,99.78 ; J15.5 131.09,97.27 ; J51.3 65.15,15.94 ; J51.3 62.47,13.26 ; J51.3 65.15,10.57 ; J51.3 67.83,13.26 ; 158.72,104.18 J8.3 ; J8.3 159.98,105.44 ; J8.3 157.46,105.44 ; J8.3 158.72,106.7 ; 52.04,114.28 J3.4 ; J3.4 53.3,115.54 ; J3.4 50.78,115.54 ; 129.58,105.44 J7.2 ; J7.2 132.1,105.44 ; J7.2 130.84,104.18 ; J7.2 130.84,106.7 ; 111.26,58.96 J47.81 ; J47.81 113.33,58.96 ; J47.81 112.3,57.92 ; J47.81 112.3,59.99 ; 113.06,114.28 J6.5 ; J6.5 111.8,115.54 ; J6.5 114.32,115.54 ; 157.46,98.52 J16.4 ; J16.4 158.72,97.27 ; J16.4 158.72,99.78 ; J16.4 159.98,98.52 ; J3.5 43.2,115.54 ; J3.5 41.94,114.28 ; J3.5 41.94,116.8 ; J3.5 40.68,115.54 ; J47.13 98.81,24.91 ; J47.13 99.84,23.88 ; J47.13 97.77,23.88 ; J47.13 98.81,22.84 ; 87.6,104.18 J4.3 ; J4.3 87.6,106.7 ; J4.3 86.34,105.44 ; J4.3 88.86,105.44 ; J9.2 167.66,105.44 ; J9.2 166.4,106.7 ; J9.2 165.14,105.44 ; J9.2 166.4,104.18 ; 104.12,115.54 J5.4 ; J5.4 106.64,115.54 ; J5.4 105.38,114.28 ; J6.2 114.32,105.44 ; J6.2 113.06,104.18 ; J6.2 111.8,105.44 ; J6.2 113.06,106.7 ; J15.3 141.19,89.68 ; J15.3 142.45,88.42 ; J15.3 139.94,88.42 ; J15.3 141.19,87.17 ; J7.3 142.2,105.44 ; J7.3 140.94,106.7 ; J7.3 140.94,104.18 ; J7.3 139.68,105.44
G_HVP: length 0.8
  TOP w0.203: 1.78,62.99 RE7.1
Net_228: length 1.5
  TOP w0.203: 69.94,71.08 v1(69.94,72.56)

## Copper pours and planes (outline as drawn; the poured copper is in the pictures)
(no net) on GND: 0.51,108.97 0.64,108.97 0.64,117.09 182.88,116.84 191.77,116.84 193.68,114.94 193.68,1.91 192.41,0.64 0.51,0.64

## Text on the board
User.Comments: GND
Ref Des/Silkscreen Top: LT1 | Vdd | Hi Ch.A | LoSense | Hi Ch.B | Vg | Ch. 1 | Ch. 2 | Ch. 3 | Ch. 4 | Ch. 7 | Ch. 5 | Ch. 8 | Ch. 6
